# EAGLE board diffamp2 (EAGLE 8.3.1)
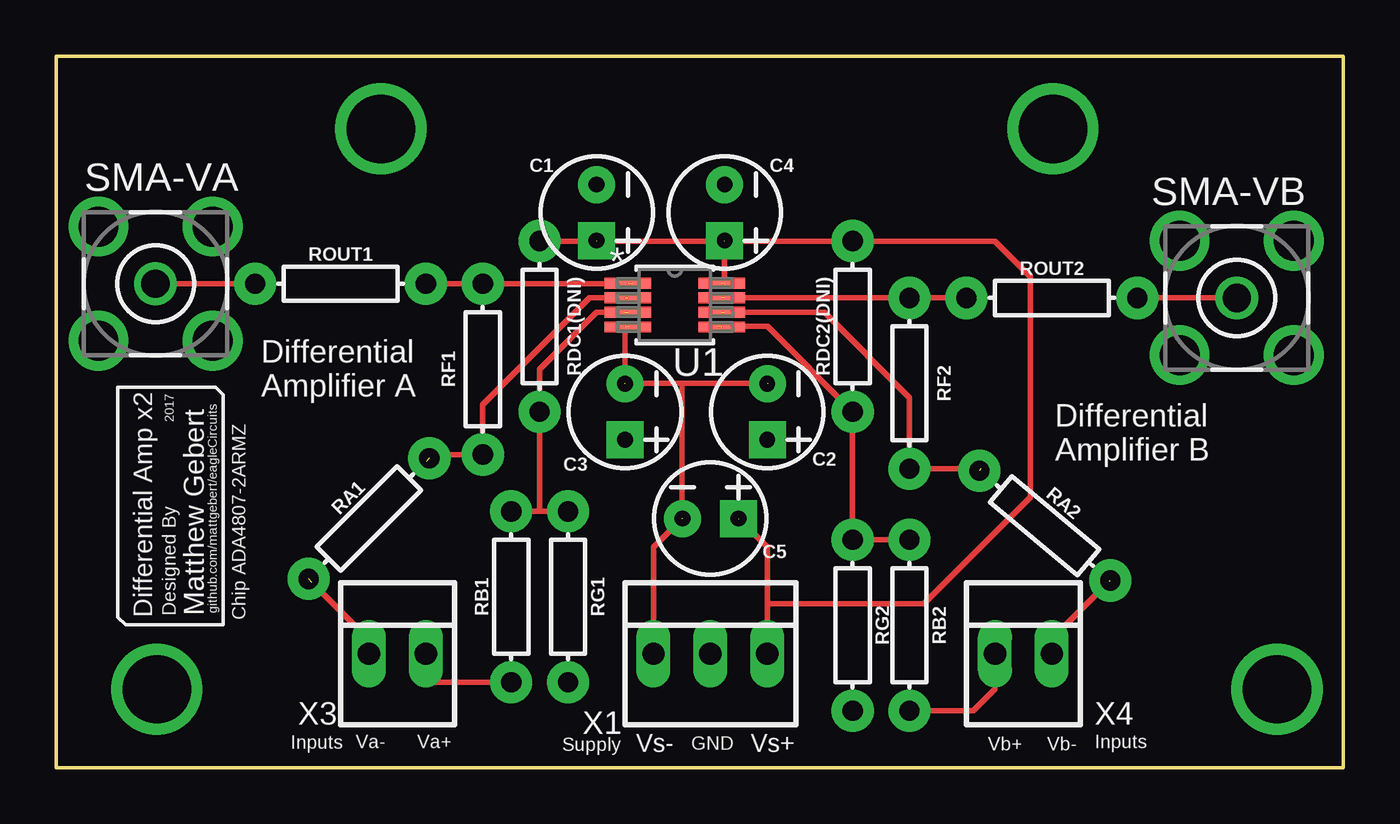
[diagram p0: board, top side]
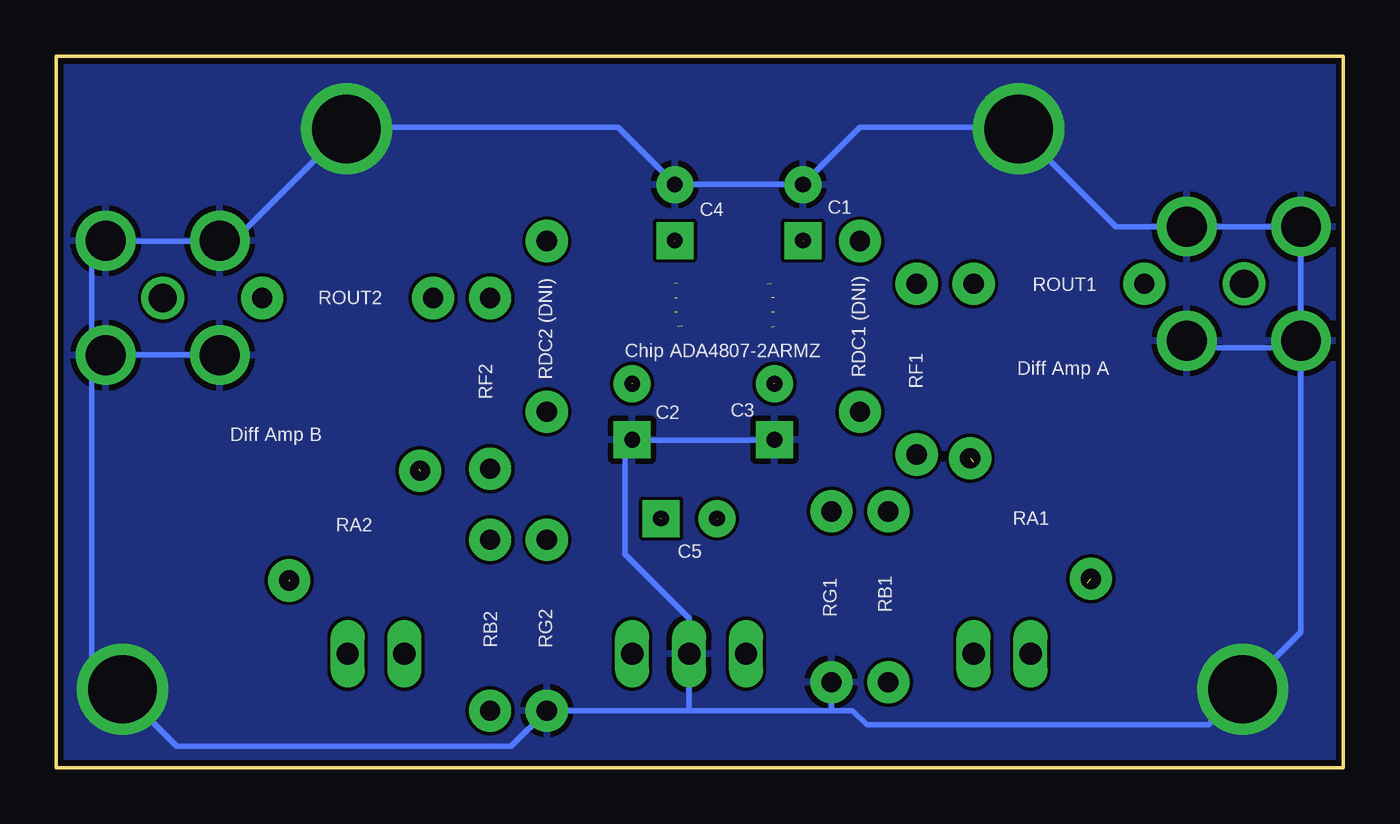
[diagram p1: board, bottom side, seen from below]

Size 57.47 x 31.75 mm. Coordinates in mm from the lower left corner, seen from the top.
Outline: 0,0 57.45,0 57.45,31.74 0,31.74 0,0
Outline: 0,0 0,31.75 57.47,31.75 57.47,0 0,0
Copper layers (1*16): Top 0.035mm / dielectric 1.5mm / Bottom 0.035mm
Design rules "SeeedStudio_2layer_DRU_no_angle_20140221": minimum track width 6mil, minimum drill 12mil, track to track 6mil, track to pad 6mil, pad to pad 6mil, via to via 6mil, smd to smd 0mil, copper to edge 10mil, drill to drill 10mil, minimum pad ring 10mil, minimum via ring 6mil, stop-mask expansion 2mil, vias tented up to drill 100mil, thermal gap 10mil

## Footprints (pad centres in the part's own frame; a part is rotated, then mirrored left to right if it is on the bottom)
CPOL-RADIAL-2.5MM-5MM = drill 0.7 pad 1.651 square: 1 1.25,0 | drill 0.7 pad 1.651: 2 -1.25,0
AXIAL-0.3 = drill 0.9 pad 1.88: P$1 -3.81,0; P$2 3.81,0
BU-SMA-V = drill 1.27: 1 0,0 | drill 1.778: 2 -2.55,2.55; 3 2.55,2.55; 4 2.55,-2.55; 5 -2.55,-2.55
RM_8-M = smd 2.083 x 0.483: 1 -2.095,0.975; 2 -2.095,0.325; 3 -2.095,-0.325; 4 -2.095,-0.975; 5 2.095,-0.975; 6 2.095,-0.325; 7 2.095,0.325; 8 2.095,0.975
22-23-2031 = drill 1 long: 1 -2.54,0; 2 0,0; 3 2.54,0
22-23-2021 = drill 1 long: 1 -1.27,0; 2 1.27,0

## Placement (x,y rotation side)
C1  10uF  [CPOL-RADIAL-2.5MM-5MM]  24.13,24.77 270 top
C2  10uF  [CPOL-RADIAL-2.5MM-5MM]  31.75,15.88 270 top
C3  0.1uF  [CPOL-RADIAL-2.5MM-5MM]  25.4,15.88 270 top
C4  0.1uF  [CPOL-RADIAL-2.5MM-5MM]  29.84,24.77 270 top
C5  10nF  [CPOL-RADIAL-2.5MM-5MM]  29.21,11.11 0 top
RA1  500  [AXIAL-0.3]  13.97,11.11 45 top
RA2  500  [AXIAL-0.3]  44.13,10.79 320.1 top
RB1  500  [AXIAL-0.3]  20.32,7.62 90 top
RB2  500  [AXIAL-0.3]  38.1,6.35 270 top
RDC1(DNI)  1k  [AXIAL-0.3]  21.59,19.68 90 top
RDC2(DNI)  1k  [AXIAL-0.3]  35.56,19.68 90 top
RF1  1k  [AXIAL-0.3]  19.05,17.78 270 top
RF2  1k  [AXIAL-0.3]  38.1,17.14 90 top
RG1  1k  [AXIAL-0.3]  22.86,7.62 270 top
RG2  1k  [AXIAL-0.3]  35.56,6.35 270 top
ROUT1  0  [AXIAL-0.3]  12.7,21.59 0 top
ROUT2  0  [AXIAL-0.3]  44.45,20.95 0 top
SMA-VA  BU-SMA-V  [BU-SMA-V]  4.45,21.59 0 top
SMA-VB  BU-SMA-V  [BU-SMA-V]  52.7,20.95 0 top
U1  ADA4807-2ARMZRM_8-M  [RM_8-M]  27.62,20.64 0 top
X1  22-23-2031  [22-23-2031]  29.21,5.08 0 top
X3  22-23-2021  [22-23-2021]  15.24,5.08 0 top
X4  22-23-2021  [22-23-2021]  43.18,5.08 0 top

## Library data of the parts
C1-C5 = SparkFun-Capacitors; PROD_ID: CAP-08440
RA1 RA2 RB1 RB2 RDC1(DNI) RDC2(DNI) RF1 RF2 RG1 RG2 ROUT1 ROUT2 = SparkFun-Resistors
SMA-VA SMA-VB = con-coax; OC_FARNELL: unknown; OC_NEWARK: unknown
U1 = ADA4807-2; MANUFACTURER_PART_NUMBER: ADA48072ARMZ; VENDOR: Analog Devices Inc
X1 = con-molex; MF: MOLEX; MPN: 22-23-2031; OC_FARNELL: 1462950; OC_NEWARK: 30C0862
X3 X4 = con-molex; MF: MOLEX; MPN: 22-23-2021; OC_FARNELL: 1462926; OC_NEWARK: 25C3832

## Nets
+5V: C1.1 C4.1 C5.1 RDC1(DNI).P$2 RDC2(DNI).P$2 U1.8 X1.3
+IN1: RB1.P$2 RDC1(DNI).P$1 RG1.P$1 U1.3
+IN2: RB2.P$1 RDC2(DNI).P$1 RG2.P$1 U1.5
-5V: C2.2 C3.2 C5.2 U1.4 X1.1
-IN1: RA1.P$2 RF1.P$2 U1.2
-IN2: RA2.P$1 RF2.P$1 U1.6
DAC-A1: RA1.P$1 X3.1
DAC-A2: RB1.P$1 X3.2
DAC-B1: RA2.P$2 X4.2
DAC-B2: RB2.P$2 X4.1
GND: C1.2 C2.1 C3.1 C4.2 RG1.P$2 RG2.P$2 SMA-VA.2 SMA-VA.3 SMA-VA.4 SMA-VA.5 SMA-VB.2 SMA-VB.3 SMA-VB.4 SMA-VB.5 X1.2
VOUT1: RF1.P$1 ROUT1.P$2 U1.1
VOUT2: RF2.P$2 ROUT2.P$1 U1.7
VSMA1: ROUT1.P$1 SMA-VA.1
VSMA2: ROUT2.P$2 SMA-VB.1

## Tracks (layer width: path | path; a pad name or v marks a point on that pad's centre or on a via)
+5V  (4 unrouted)
  Top 0.254: RDC1(DNI).P$2 24.13,23.5 29.84,23.5 | 29.84,23.5 RDC2(DNI).P$2 41.91,23.5 43.5,21.91 43.5,12.06 38.73,7.3 31.75,7.3 | 29.84,23.5 29.84,21.59 | 30.48,11.11 31.75,9.84 31.75,7.3 | X1.3 31.75,7.3
+IN1  (1 unrouted)
  Top 0.254: 25.4,20.32 24.13,20.32 21.59,17.78 RDC1(DNI).P$1 21.59,11.43 | RB1.P$2 21.59,11.43 | 21.59,11.43 RG1.P$1
+IN2  (1 unrouted)
  Top 0.254: RB2.P$1 RG2.P$1 RDC2(DNI).P$1 31.75,19.68 29.53,19.68
-5V  (4 unrouted)
  Top 0.254: 25.4,19.68 25.4,17.14 27.94,17.14 | 27.94,17.14 31.75,17.14 | 27.94,17.14 27.94,11.11 26.67,9.84 X1.1
-IN1  (2 unrouted)
  Top 0.254: 25.4,20.95 23.81,20.95 19.05,16.19 RF1.P$2 16.83,13.97 16.51,13.65
-IN2  (2 unrouted)
  Top 0.254: 29.84,20.32 34.29,20.32 38.1,16.51 RF2.P$1 41.27,13.34
DAC-A1  (1 unrouted)
  Top 0.254: X3.1 13.97,5.71 11.43,8.26
DAC-A2
  Top 0.254: X3.2 16.51,4.13 16.83,3.81 RB1.P$1
DAC-B1  (1 unrouted)
  Top 0.254: 47.02,8.31 44.45,5.74 X4.2
DAC-B2
  Top 0.254: X4.1 41.91,3.49 40.96,2.54 RB2.P$2
GND  (via drill 3.05)
  Bottom 0.254: 29.21,2.54 X1.2 29.21,6.67 32.07,9.53 32.07,14.29 31.75,14.61 25.4,14.61 | 29.21,2.54 RG2.P$2 37.15,0.95 52.07,0.95 55.88,4.76 55.88,18.41 | 29.21,2.54 22.86,2.54 | 55.88,18.41 55.88,23.5 49.53,23.5 44.45,28.57 32.38,28.57 29.84,26.04 24.13,26.04 21.59,28.57 14.61,28.57 10.16,24.13 SMA-VA.2 SMA-VA.5 2.22,18.73 6.99,18.73 | 55.88,18.41 50.8,18.41 | 1.91,18.73 1.91,6.03 6.03,1.91 21.27,1.91 21.91,2.54 22.86,2.54 | 22.86,2.54 RG1.P$2
  other vias: 4.5,3.5 54.5,3.5 44.5,28.5 14.5,28.5
  pour Bottom: 0,31.75 0,0 57.47,0 57.47,31.75
VOUT1  (1 unrouted)
  Top 0.254: ROUT1.P$2 RF1.P$1 25.72,21.59
VOUT2  (1 unrouted)
  Top 0.254: 29.84,20.95 RF2.P$2 ROUT2.P$1
VSMA1
  Top 0.254: SMA-VA.1 ROUT1.P$1
VSMA2
  Top 0.254: ROUT2.P$2 SMA-VB.1

## Text on the board
tNames: Differential / Amplifier A | 2017 | Differential / Amplifier B | Differential Amp x2 | Designed By | Matthew Gebert | github.com/mattgebert/eagleCircuits | Chip ADA4807-2ARMZ | Inputs | Va- | Va+ | Supply | Vs- | GND | Vs+ | Vb+ | Vb- | Inputs
bNames: C1 | C4 | RDC1 (DNI) | RDC2 (DNI) | ROUT1 | ROUT2 | RF1 | Diff Amp A | Chip ADA4807-2ARMZ | C3 | C2 | RF2 | Diff Amp B | RA1 | RA2 | RB1 | C5 | RG1 | RG2 | RB2